# Allegro board P1 BUN.brd
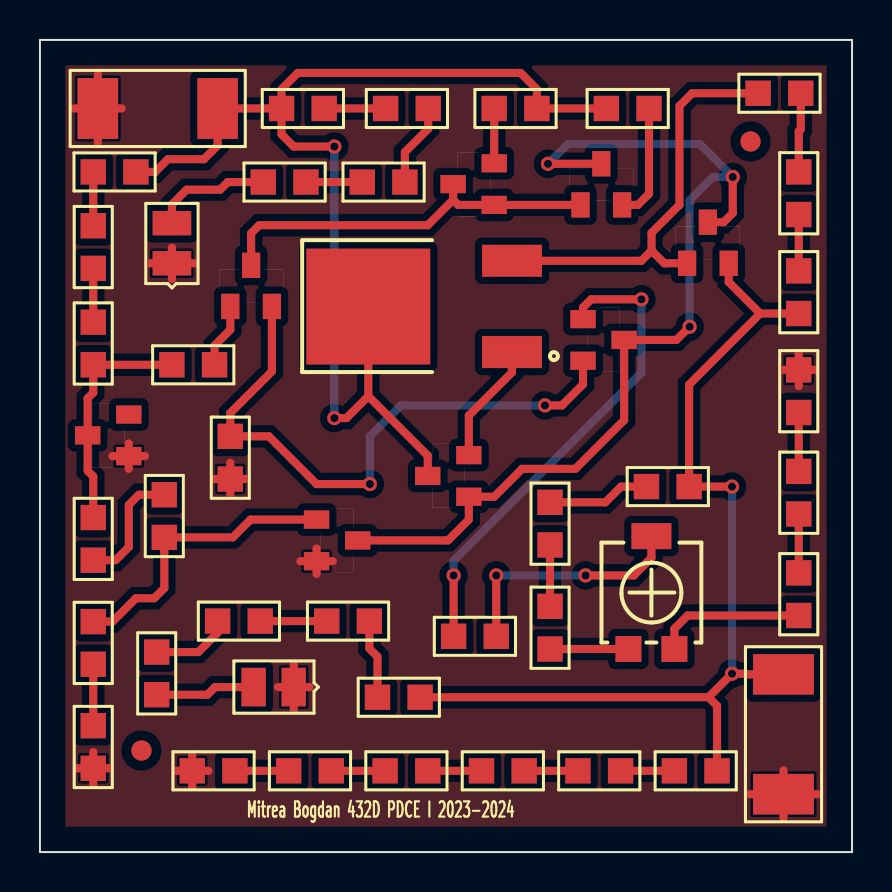
[diagram p0: board, top side]
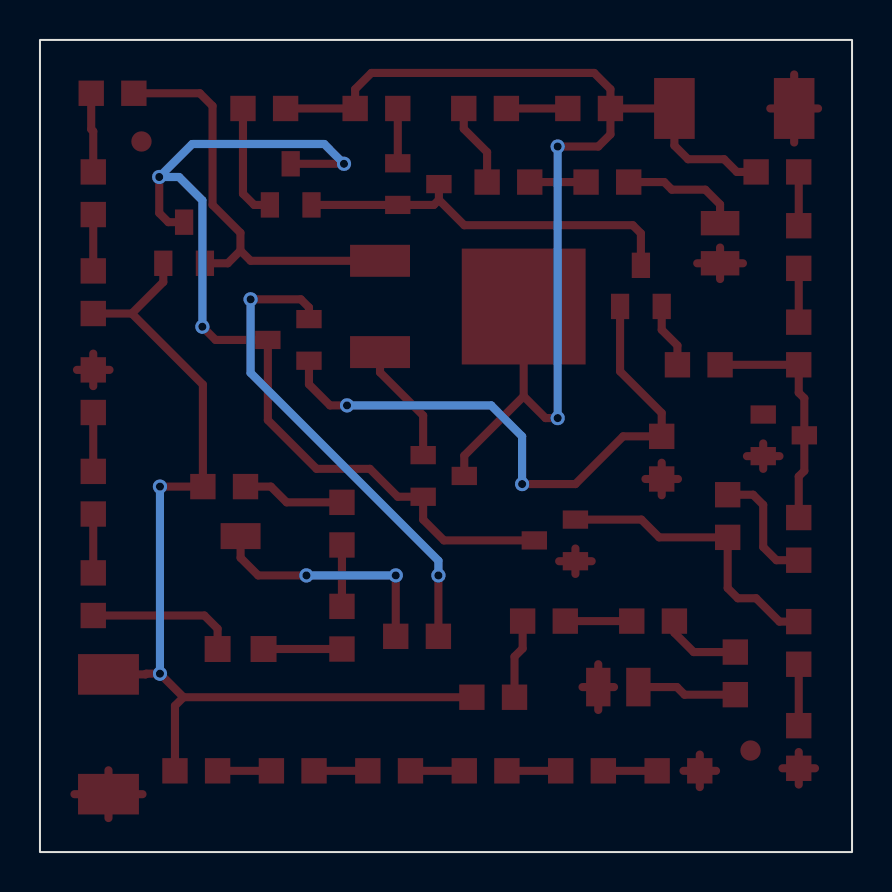
[diagram p1: board, bottom side, seen from below]

Outline 40.64 x 40.64 mm; copper layers: TOP, BOTTOM. Coordinates in mm from the lower left corner of the outline.
Outline path: rectangle 0,0 40.64,40.64

## Design rules (mm)
nets with their own width: min track width 0.406; nets 0 N01166 N03301 N04129 N04200 N04204 N04251 N05464 N06633 N21003 N21156 N21332 N21365 N21864 N21868 N22993 N22997 N25552 N25724 N25728 N25842 N26106 N26191 N26235 N35529 N37526 N37897 N38194 N55818 N58806 N58949 N68675 N68852 N109591 N109830 N109831 N119671 N223441 N628941 TEMP

## Placement (name value [footprint] x y rotation side)
D1  SMLS14BET  [SMD0805]  6.6 29.46 90 top
D2  BZX84-C5V6  [TO236AA]  4.45 19.81 0 top
D3  SMLS14BET  [SMD0805]  12.7 8.26 180 top
J1  CON2  [SMR2512]  8.89 37.21 180 top
J2  CON2  [SMR2512]  37.21 8.89 270 top
NOREF  -  [unnamed]  35.56 35.56 0 top
NOREF#2  -  [unnamed]  5.08 5.08 0 top
Q1  QBC856B  [TO236AA]  22.73 32.38 0 top
Q2  QBC856B  [TO236AA]  27.05 32.38 270 top
Q3  QBC846B  [TO236AA]  9.53 27.3 270 top
Q4  QBC846B  [TO236AA]  27.18 26.67 180 top
Q5  QBC846B  [TO236AA]  13.84 16.64 180 top
Q6  QBC846B  [TO236AA]  21.46 17.78 0 top
Q7  QMJD31C  [DPACK]  23.62 25.02 90 top
Q8  QBC846B  [TO236AA]  32.38 29.46 270 top
R1  680  [SMR0805]  14.22 37.21 180 top
R2  680  [SMR0805]  19.43 37.21 180 top
R3  680  [SMR0805]  16.13 33.53 0 top
R4  680  [SMR0805]  11.18 33.53 0 top
R5  2k  [SMR0805]  2.67 34.04 0 top
R6  1k  [SMR0805]  22.73 37.21 0 top
R7  1k  [SMR0805]  30.48 37.21 180 top
R8  510  [SMR0805]  6.6 24.38 0 top
R9  510  [SMR0805]  20.7 10.79 0 top
R10  1k  [SMR0805]  9.53 18.67 90 top
R11  2k  [SMR0805]  2.67 14.61 90 top
R12  3.3k  [SMR0805]  6.22 15.75 90 top
R13  470  [SMR0805]  2.67 9.4 90 top
R14  82  [SMR0805]  2.67 4.19 90 top
R15  0.47  [SMR0805]  35.94 37.97 0 top
R16  0.47  [SMR0805]  37.97 34.04 270 top
R17  0.47  [SMR0805]  37.97 29.08 270 top
R18  1.5k  [SMR0805]  30.35 18.29 0 top
R19  220  [SMR0805]  25.53 15.37 90 top
R20  51  [SMR0805]  25.53 10.16 90 top
R21  2k  [TS53YL]  31.75 10.16 270 top
R22  1k  [SMR0805]  37.97 13.97 270 top
R23  330  [SMR0805]  37.97 19.05 270 top
R24  51  [SMR0805]  37.97 24.13 270 top
R25  220  [SMR0805]  16.89 7.75 0 top
R26  220  [SMR0805]  14.35 11.56 0 top
R27  220  [SMR0805]  8.89 11.56 0 top
R28  150  [SMR0805]  5.84 7.87 90 top
R29  150  [SMR0805]  31.75 4.06 0 top
R30  150  [SMR0805]  26.92 4.06 0 top
R31  150  [SMR0805]  22.1 4.06 0 top
R32  150  [SMR0805]  17.27 4.06 0 top
R33  150  [SMR0805]  12.45 4.06 0 top
R34  10  [SMR0805]  7.62 4.06 0 top
R35  2k  [SMR0805]  2.67 29.21 90 top
R36  680  [SMR0805]  2.67 24.38 90 top

## Library data of the parts
D1 = SMLS14BET_3
D2 = BZX84-C5V6_2
D3 = SMLS14BET_4
J1 J2 = CON2_0
Q1 Q2 = QBC856B_2
Q3 = QBC846B_2
Q4 = QBC846B_3
Q5 = QBC846B_1
Q6 = QBC846B_4
Q7 = QMJD31C_2
Q8 = QBC846B_0
R1-R20 R22-R36 = R
R21 = POT

## Footprints (pads in the part's own frame, mm; a bottom-side part is the same pattern mirrored in y, then rotated)
DPACK
  rect 1.6x3 smd: 1(0,0) 3(4.57,0)
  rect 5.8x6.2 smd: 2(2.28,7.19)
SMD0805
  rect 1.219x1.93 smd: A(2.007,0) C(0,0)
SMR0805
  rect 1.27x1.27 smd: 1(0,0) 2(2.134,0)
SMR2512
  rect 2.032x3.048 smd: 1(0,0) 2(5.994,0)
TO236AA
  rect 1.27x0.914 smd: 1(0,0) 2(0,2.083) 3(-2.057,1.041)
TS53YL
  rect 1.3x1.3 smd: 1(0,0) 3(0,-2.3)
  rect 1.3x2 smd: 2(-5.65,-1.15)
unnamed
  round 1.016 smd: (0,0)

## Nets
0: D1.C D2.1 D3.C J1.2 J2.2 Q5.2(E) R10.1 R14.1 R24.1 R34.1
TEMP: Q2.3 Q4.3 Q5.3 Q6.1 Q8.3
N01166: J1.1 Q6.3 Q7.2 R1.2 R5.2 R6.2 R7.2
N03301: Q7.3(E) Q8.1 R15.1
N04129: Q3.2(E) Q4.2(E) R10.2
N04200: Q2.2(E) R7.1
N04204: Q1.1 Q1.3 Q2.1 Q3.3
N04251: Q1.2(E) R6.1
N05464: J2.1 Q8.2(E) R17.2 R18.2 R25.2 R29.2
N06633: D2.3 R8.1 R11.2 R36.1
N21003: R1.1 R2.2
N21156: R2.1 R3.2
N21332: D1.A R4.1
N21365: R3.1 R4.2
N21864: R16.2 R17.1
N21868: R15.2 R16.1
N22993: R30.1 R31.2
N22997: R31.1 R32.2
N25552: R25.1 R26.2
N25724: R26.1 R27.2
N25728: D3.A R28.1
N25842: R27.1 R28.2
N26106: R29.1 R30.2
N26191: R32.1 R33.2
N26235: R33.1 R34.2
N35529: Q6.2(E) Q7.1
N37526: R9.2 R21.2(T)
N37897: Q4.1 R9.1
N38194: Q3.1 R8.2
N55818: Q5.1 R12.1 R13.2
N58806: R13.1 R14.2
N58949: R11.1 R12.2
N68675: R5.1 R35.2
N68852: R35.1 R36.2
N109591: R18.1 R19.2
N109830: R20.1 R21.3
N109831: R21.1 R22.2
N119671: R19.1 R20.2
N223441: R22.1 R23.2
N628941: R23.1 R24.2

Pads without a net: D2 2

## Via types
v1: diameter 0.711, hole 0.406, TOP to BOTTOM, 13 vias

## Routing (per net, layer and track width the routed paths; a pad name or vN(x,y) marks a point on that pad's centre or on a via; arc(x,y) is an arc through that point)
0: length 38.1
  TOP w0.406: 4.45,19.18 D2.1 ; D2.1 3.63,19.81 ; D2.1 5.26,19.81 ; D2.1 4.45,20.45 ; 7.62,3.25 R34.1 ; R34.1 6.81,4.06 ; R34.1 7.62,4.88 ; R34.1 8.43,4.06 ; 37.21,1.7 J2.2 ; J2.2 35.51,2.9 ; J2.2 37.21,4.09 ; J2.2 38.91,2.9 ; J1.2 2.9,38.91 ; J1.2 4.09,37.21 ; J1.2 2.9,35.51 ; J1.2 1.7,37.21 ; 13.03,14.55 Q5.2 ; Q5.2 13.84,15.19 ; Q5.2 14.66,14.55 ; Q5.2 13.84,13.92 ; 6.6,28.68 D1.C ; D1.C 5.46,29.46 ; D1.C 6.6,30.25 ; D1.C 7.75,29.46 ; 37.16,24.13 R24.1 ; R24.1 38.79,24.13 ; R24.1 37.97,24.94 ; R24.1 37.97,23.32 ; D3.C 12.7,9.4 ; D3.C 12.7,7.11 ; D3.C 11.91,8.26 ; D3.C 13.49,8.26 ; R10.1 10.34,18.67 ; R10.1 8.71,18.67 ; R10.1 9.53,17.86 ; R10.1 9.53,19.48 ; R14.1 2.67,5 ; R14.1 3.48,4.19 ; R14.1 1.85,4.19 ; R14.1 2.67,3.38
TEMP: length 49.3
  TOP w0.406: Q8.3 34.21,31.52 34.67,31.98 v1(34.67,33.78) ; v1(32.51,26.29) 31.85,25.63 Q4.3 29.24,21.62 26.8,19.18 24.13,19.18 22.73,17.78 Q6.1 21.46,16.64 20.42,15.6 Q5.3 ; Q2.3 v1(25.43,34.44)
  BOTTOM w0.406: v1(25.43,34.44) 26.42,35.43 33.02,35.43 v1(34.67,33.78) 33.68,33.78 32.51,32.61 v1(32.51,26.29)
N01166: length 58.2
  TOP w0.406: R7.2 R6.2 24.87,38.18 24.05,38.99 12.9,38.99 12.09,38.18 R1.2 ; Q6.3 19.41,19.84 16.43,22.81 ; 16.43,22.81 15.34,21.72 v1(14.73,21.72) ; 16.43,22.81 Q7.2 ; R1.2 12.09,35.92 12.7,35.31 v1(14.73,35.31) ; R1.2 J1.1 8.89,35.36 8.2,34.67 6.4,34.67 5.77,34.04 R5.2
  BOTTOM w0.406: v1(14.73,35.31) v1(14.73,21.72)
N03301: length 21.3
  TOP w0.406: 30.61,30.1 30.61,30.99 32,32.38 32,37.34 32.64,37.97 R15.1 ; 30.61,30.1 30.1,29.59 Q7.3 ; 30.61,30.1 31.24,29.46 Q8.1
N04129: length 30.7
  TOP w0.406: v1(16.51,18.41) 13.84,18.41 11.46,20.8 R10.2 9.53,21.97 11.61,24.05 Q3.2 ; Q4.2 27.18,23.41 26.12,22.35 v1(25.27,22.35)
  BOTTOM w0.406: v1(16.51,18.41) 16.51,20.8 18.06,22.35 v1(25.27,22.35)
N04200: length 5.8
  TOP w0.406: Q2.2 29.92,32.38 30.48,32.94 R7.1
N04204: length 19.7
  TOP w0.406: Q3.3 10.57,30.96 10.97,31.37 19.41,31.37 20.68,32.64 ; Q2.1 Q1.1 20.93,32.38 20.68,32.64 ; 20.68,32.64 Q1.3
N04251: length 2.7
  TOP w0.406: Q1.2 R6.1
N05464: length 49.3
  TOP w0.406: R25.2 33.46,7.75 ; 33.46,7.75 33.88,7.32 R29.2 ; 33.46,7.75 v1(34.64,8.93) 35.32,8.93 35.36,8.89 J2.1 ; 36.04,26.95 R17.2 ; 36.04,26.95 34.47,28.52 Q8.2 ; 36.04,26.95 32.49,23.39 R18.2 v1(34.64,18.29)
  BOTTOM w0.406: v1(34.64,8.93) v1(34.64,18.29)
N06633: length 11.8
  TOP w0.406: R8.1 R36.1 2.67,22.99 2.39,22.71 D2.3 2.39,19.08 2.67,18.8 R11.2
N21003: length 3.1
  TOP w0.406: R1.1 R2.2
N21156: length 4.2
  TOP w0.406: R2.1 19.43,36.2 18.26,35.03 R3.2
N21332: length 6
  TOP w0.406: R4.1 9.4,33.53 9.02,33.15 7.34,33.15 6.6,32.41 D1.A
N21365: length 2.8
  TOP w0.406: R3.1 R4.2
N21864: length 2.8
  TOP w0.406: R17.1 R16.2
N21868: length 4
  TOP w0.406: R16.1 37.97,36.07 38.07,36.17 R15.2
N22993: length 2.7
  TOP w0.406: R31.2 R30.1
N22997: length 2.7
  TOP w0.406: R32.2 R31.1
N25552: length 4
  TOP w0.406: R25.1 16.89,9.78 16.48,10.19 R26.2
N25724: length 3.3
  TOP w0.406: R27.2 R26.1
N25728: length 5
  TOP w0.406: D3.A 8.76,8.26 8.38,7.87 R28.1
N25842: length 4
  TOP w0.406: R27.1 8.89,10.97 7.92,10.01 R28.2
N26106: length 2.7
  TOP w0.406: R30.2 R29.1
N26191: length 2.7
  TOP w0.406: R33.2 R32.1
N26235: length 2.7
  TOP w0.406: R34.2 R33.1
N35529: length 6.1
  TOP w0.406: Q6.2 21.46,21.84 23.62,24 Q7.1
N37526: length 12.3
  TOP w0.406: R21.2 30.6,14.72 29.72,13.84 v1(27.3,13.84) ; v1(22.83,13.84) R9.2
  BOTTOM w0.406: v1(27.3,13.84) v1(22.83,13.84)
N37897: length 24.4
  TOP w0.406: Q4.1 27.18,27.25 27.58,27.66 v1(30.1,27.66) ; v1(20.7,13.84) R9.1
  BOTTOM w0.406: v1(30.1,27.66) 30.1,23.98 20.7,14.58 v1(20.7,13.84)
N38194: length 3.2
  TOP w0.406: R8.2 8.74,25.35 9.53,26.14 Q3.1
N55818: length 14.8
  TOP w0.406: Q5.1 10.54,16.64 9.65,15.75 R12.1 6.22,13.21 5.71,12.7 4.8,12.7 3.63,11.53 R13.2
N58806: length 3.1
  TOP w0.406: R14.2 R13.1
N58949: length 6.1
  TOP w0.406: R12.2 4.95,17.88 4.45,17.37 4.45,15.27 3.78,14.61 R11.1
N68675: length 2.7
  TOP w0.406: R35.2 R5.1
N68852: length 2.7
  TOP w0.406: R36.2 R35.1
N109591: length 5.2
  TOP w0.406: R19.2 28.3,17.5 29.08,18.29 R18.1
N109830: length 3.9
  TOP w0.406: R20.1 R21.3
N109831: length 7.5
  TOP w0.406: R21.1 31.75,11.18 32.41,11.84 R22.2
N119671: length 3.1
  TOP w0.406: R20.2 R19.1
N223441: length 2.9
  TOP w0.406: R23.2 R22.1
N628941: length 2.9
  TOP w0.406: R24.2 R23.1

## Copper pours and planes (outline as drawn; the poured copper is in the pictures)
0 on TOP: 1.27,1.27 1.27,39.37 39.37,39.37 39.37,1.27

## Text on the board
Ref Des/Silkscreen Top: Mitrea Bogdan 432D PDCE I 2023-2024
XSECTION_CHART: *  SURFACE - AIR 0 MIL | L1 TOP CONDUCTOR - COPPER 1.4 MIL | *  DIELECTRIC - FR-4 61.2 MIL | L2 BOTTOM CONDUCTOR - COPPER 1.4 MIL | DESIGN CROSS SECTION CHART | ___________________________ | TOTAL THICKNESS 64 MIL | 1-2
NCLEGEND-1-2: FIGURE | FINISHED_SIZE | 16.0 | DRILL CHART: TOP to BOTTOM | ALL UNITS ARE IN MILS | PLATED | QTY | 13
